# EAGLE board XuLA-6SLX (EAGLE 5.11)
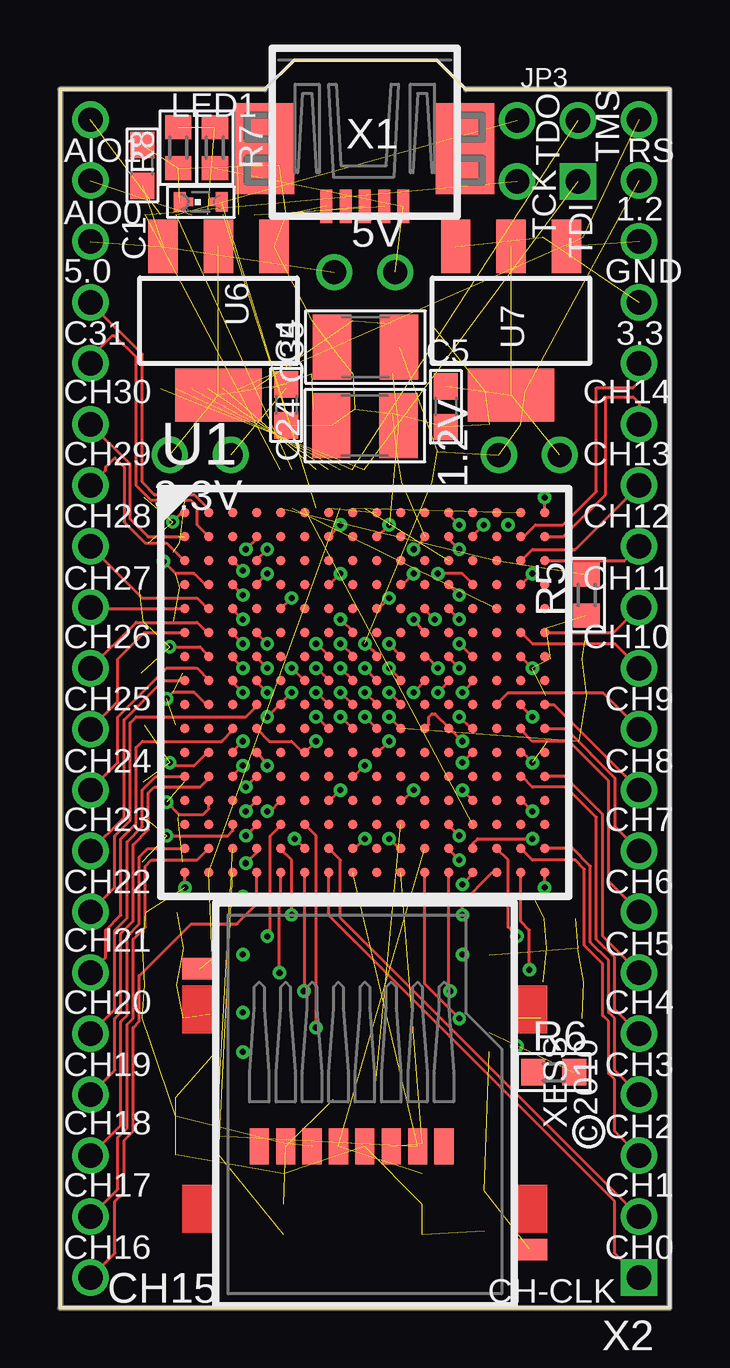
[diagram p0: board, top side]
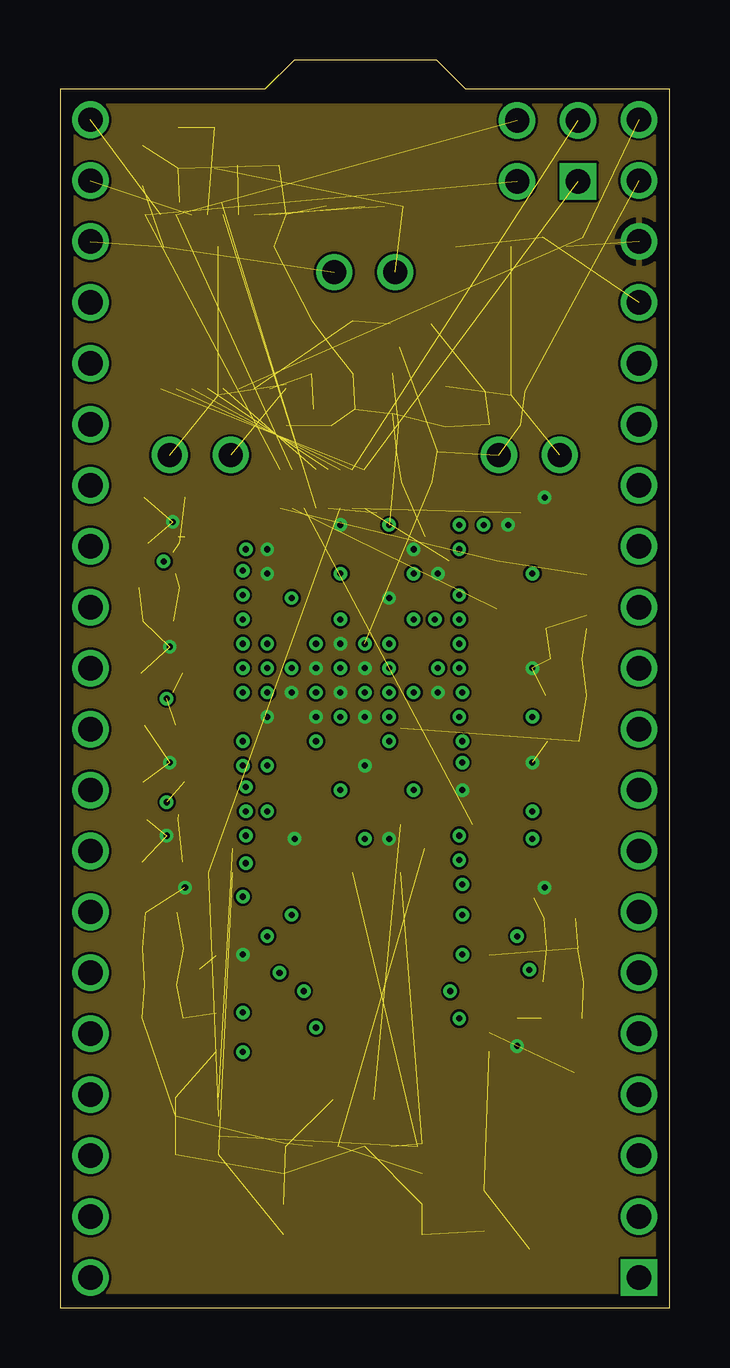
[diagram p1: board, inner layer Route2]
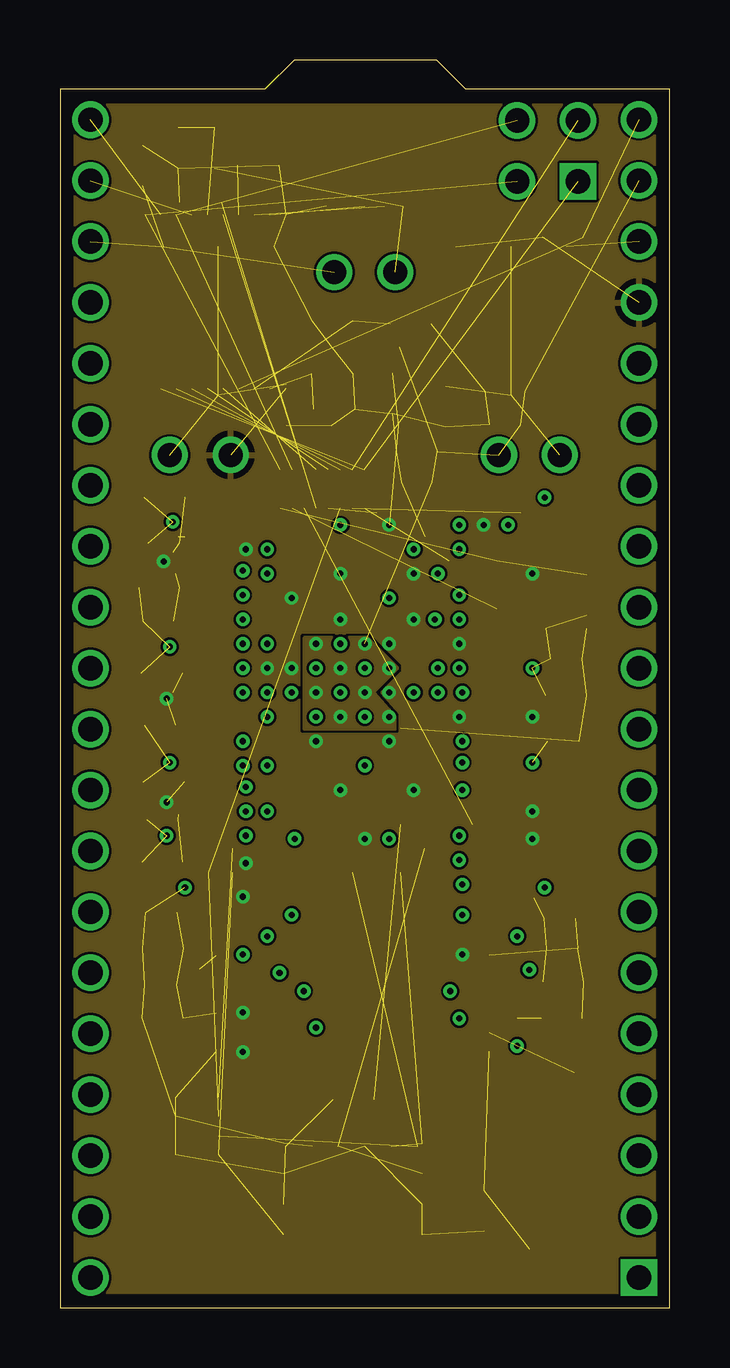
[diagram p2: board, inner layer Route3]
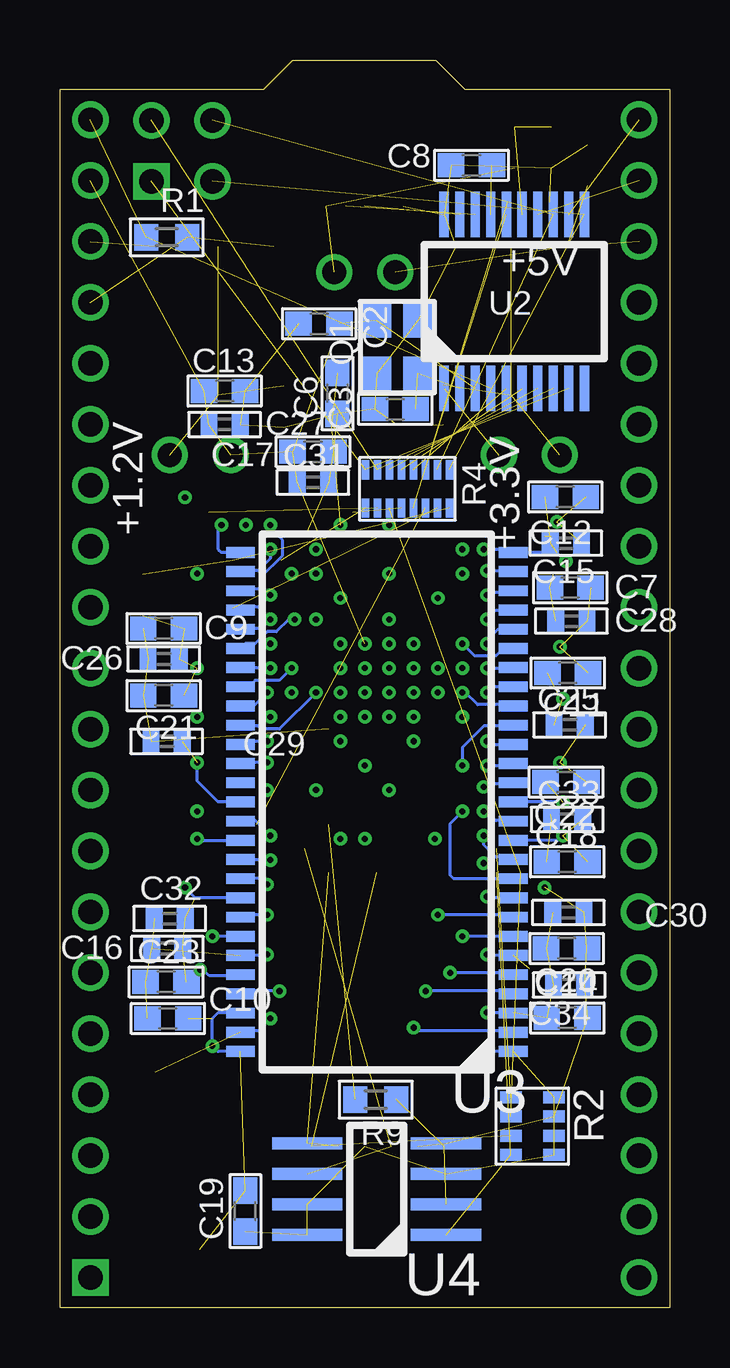
[diagram p3: board, bottom side, seen from below]

Size 25.4 x 52.02 mm. Coordinates in mm from the lower left corner, seen from the top.
Outline: 0,50.8 0,0 25.4,0 25.4,50.8 16.92,50.8 15.7,52.02 9.75,52.02 8.53,50.8 0,50.8
Copper layers (1*2*3*16): Top 0.035mm / dielectric 0.126mm / Route2 0.035mm / dielectric 1.626mm / Route3 0.035mm / dielectric 0.126mm / Bottom 0.035mm
Design rules "SEP_4layer": minimum track width 5mil, minimum drill 10mil, track to track 0.1mm, track to pad 0.1295mm, pad to pad 0.1mm, via to via 0.1mm, smd to smd 0.1mm, copper to edge 0.15mm, drill to drill 0.2mm, minimum pad ring 10mil, minimum via ring 6mil, stop-mask expansion 2mil, vias tented up to drill 0.6071mm, thermal gap 10mil
Net classes: 1 power: clearance 0.254 mm

## Footprints (pad centres in the part's own frame; a part is rotated, then mirrored left to right if it is on the bottom)
JP1-NOSILK = drill 1 round: 1 0,-1.27; 2 0,1.27
C0603 = smd 1.1 x 1: 1 -0.85,0; 2 0.85,0
C0402 = smd 0.7 x 0.9: 1 -0.65,0; 2 0.65,0
C1210 = smd 1.6 x 2.7: 1 -1.4,0; 2 1.4,0
2X02-NOSILK = drill 1.016 square: 1 -1.27,-1.27 | drill 1.016 round: 2 -1.27,1.27; 3 1.27,-1.27; 4 1.27,1.27
CHIPLED-0603-TTW = smd 0.8 x 0.5: A 0,-0.875; C 0,0.875 | smd 0.35 x 0.35: A@1 0,-0.5; C@1 0,0.5
32X25 = smd 1.2 x 1.4: 1 0,0; 2 0,-2.2; 3 1.7,-2.2; 4 1.7,0
R0603 = smd 1 x 1.1: 1 -0.85,0; 2 0.85,0
742C083 = smd 0.5 x 0.9: 1 -0.4,-0.9; 2 0.4,-0.9; 3 1.2,-0.9; 4 2,-0.9; 5 2,0.9; 6 1.2,0.9; 7 0.4,0.9; 8 -0.4,0.9
741X163 = smd 0.3 x 0.8: 1 -1.75,-0.8; 2 -1.25,-0.8; 3 -0.75,-0.8; 4 -0.25,-0.8; 5 0.25,-0.8; 6 0.75,-0.8; 7 1.25,-0.8; 8 1.75,-0.8; 9 1.75,0.8; 10 1.25,0.8; 11 0.75,0.8; 12 0.25,0.8; 13 -0.25,0.8; 14 -0.75,0.8; 15 -1.25,0.8; 16 -1.75,0.8
XILINX-FT256 = smd 0.4 x 0.4: A1 0,0; A2 1,0; A3 2,0; A4 3,0; A5 4,0; A6 5,0; A7 6,0; A8 7,0; A9 8,0; A10 9,0; A11 10,0; A12 11,0; A13 12,0; A14 13,0; A15 14,0; A16 15,0; B1 0,-1; B2 1,-1; B3 2,-1; B4 3,-1; B5 4,-1; B6 5,-1; B7 6,-1; B8 7,-1; B9 8,-1; B10 9,-1; B11 10,-1; B12 11,-1; B13 12,-1; B14 13,-1; B15 14,-1; B16 15,-1; C1 0,-2; C2 1,-2; C3 2,-2; C4 3,-2; C5 4,-2; C6 5,-2; C7 6,-2; C8 7,-2; C9 8,-2; C10 9,-2; C11 10,-2; C12 11,-2; C13 12,-2; C14 13,-2; C15 14,-2; C16 15,-2; D1 0,-3; D2 1,-3; D3 2,-3; D4 3,-3; D5 4,-3; D6 5,-3; D7 6,-3; D8 7,-3; D9 8,-3; D10 9,-3; D11 10,-3; D12 11,-3; D13 12,-3; D14 13,-3; D15 14,-3; D16 15,-3; E1 0,-4; E2 1,-4; E3 2,-4; E4 3,-4; E5 4,-4; E6 5,-4; E7 6,-4; E8 7,-4; E9 8,-4; E10 9,-4; E11 10,-4; E12 11,-4; E13 12,-4; E14 13,-4; E15 14,-4; E16 15,-4; F1 0,-5; F2 1,-5; F3 2,-5; F4 3,-5; F5 4,-5; F6 5,-5; F7 6,-5; F8 7,-5; F9 8,-5; F10 9,-5; F11 10,-5; F12 11,-5; F13 12,-5; F14 13,-5; F15 14,-5; F16 15,-5; G1 0,-6; G2 1,-6; G3 2,-6; G4 3,-6; G5 4,-6; G6 5,-6; G7 6,-6; G8 7,-6; G9 8,-6; G10 9,-6; G11 10,-6; G12 11,-6; G13 12,-6; G14 13,-6; G15 14,-6; G16 15,-6; H1 0,-7; H2 1,-7; H3 2,-7; H4 3,-7; H5 4,-7; H6 5,-7; H7 6,-7; H8 7,-7; H9 8,-7; H10 9,-7; H11 10,-7; H12 11,-7; H13 12,-7; H14 13,-7; H15 14,-7; H16 15,-7; J1 0,-8; J2 1,-8; J3 2,-8; J4 3,-8; J5 4,-8; J6 5,-8; J7 6,-8; J8 7,-8; J9 8,-8; J10 9,-8; J11 10,-8; J12 11,-8; J13 12,-8; J14 13,-8; J15 14,-8; J16 15,-8; K1 0,-9; K2 1,-9; K3 2,-9; K4 3,-9; K5 4,-9; K6 5,-9; K7 6,-9; K8 7,-9; K9 8,-9; K10 9,-9; K11 10,-9; K12 11,-9; K13 12,-9; K14 13,-9; K15 14,-9; K16 15,-9; L1 0,-10; L2 1,-10; L3 2,-10; L4 3,-10; L5 4,-10; L6 5,-10; L7 6,-10; L8 7,-10; L9 8,-10; L10 9,-10; L11 10,-10; L12 11,-10; L13 12,-10; L14 13,-10; L15 14,-10; L16 15,-10; M1 0,-11; M2 1,-11; M3 2,-11; M4 3,-11; M5 4,-11; M6 5,-11; M7 6,-11; M8 7,-11; M9 8,-11; M10 9,-11; M11 10,-11; M12 11,-11; M13 12,-11; M14 13,-11; M15 14,-11; M16 15,-11; N1 0,-12; N2 1,-12; N3 2,-12; N4 3,-12; N5 4,-12; N6 5,-12; N7 6,-12; N8 7,-12; N9 8,-12; N10 9,-12; N11 10,-12; N12 11,-12; N13 12,-12; N14 13,-12; N15 14,-12; N16 15,-12; P1 0,-13; P2 1,-13; P3 2,-13; P4 3,-13; P5 4,-13; P6 5,-13; P7 6,-13; P8 7,-13; P9 8,-13; P10 9,-13; P11 10,-13; P12 11,-13; P13 12,-13; P14 13,-13; P15 14,-13; P16 15,-13; R1 0,-14; R2 1,-14; R3 2,-14; R4 3,-14; R5 4,-14; R6 5,-14; R7 6,-14; R8 7,-14; R9 8,-14; R10 9,-14; R11 10,-14; R12 11,-14; R13 12,-14; R14 13,-14; R15 14,-14; R16 15,-14; T1 0,-15; T2 1,-15; T3 2,-15; T4 3,-15; T5 4,-15; T6 5,-15; T7 6,-15; T8 7,-15; T9 8,-15; T10 9,-15; T11 10,-15; T12 11,-15; T13 12,-15; T14 13,-15; T15 14,-15; T16 15,-15
MICROCHIP-20_SSOP = smd 1.89 x 0.38: 1 0,0; 2 0,-0.65; 3 0,-1.3; 4 0,-1.95; 5 0,-2.6; 6 0,-3.25; 7 0,-3.9; 8 0,-4.55; 9 0,-5.2; 10 0,-5.85; 11 7.25,-5.85; 12 7.25,-5.2; 13 7.25,-4.55; 14 7.25,-3.9; 15 7.25,-3.25; 16 7.25,-2.6; 17 7.25,-1.95; 18 7.25,-1.3; 19 7.25,-0.65; 20 7.25,0
TSOPII-54 = smd 1.2 x 0.45: 1 0,0; 2 0,-0.8; 3 0,-1.6; 4 0,-2.4; 5 0,-3.2; 6 0,-4; 7 0,-4.8; 8 0,-5.6; 9 0,-6.4; 10 0,-7.2; 11 0,-8; 12 0,-8.8; 13 0,-9.6; 14 0,-10.4; 15 0,-11.2; 16 0,-12; 17 0,-12.8; 18 0,-13.6; 19 0,-14.4; 20 0,-15.2; 21 0,-16; 22 0,-16.8; 23 0,-17.6; 24 0,-18.4; 25 0,-19.2; 26 0,-20; 27 0,-20.8; 28 11.36,-20.8; 29 11.36,-20; 30 11.36,-19.2; 31 11.36,-18.4; 32 11.36,-17.6; 33 11.36,-16.8; 34 11.36,-16; 35 11.36,-15.2; 36 11.36,-14.4; 37 11.36,-13.6; 38 11.36,-12.8; 39 11.36,-12; 40 11.36,-11.2; 41 11.36,-10.4; 42 11.36,-9.6; 43 11.36,-8.8; 44 11.36,-8; 45 11.36,-7.2; 46 11.36,-6.4; 47 11.36,-5.6; 48 11.36,-4.8; 49 11.36,-4; 50 11.36,-3.2; 51 11.36,-2.4; 52 11.36,-1.6; 53 11.36,-0.8; 54 11.36,0
SPI-8_SOIC_150_208 = smd 2.921 x 0.51: 1 1.06,0; 2 1.06,-1.27; 3 1.06,-2.54; 4 1.06,-3.81; 5 6.839,-3.81; 6 6.839,-2.54; 7 6.839,-1.27; 8 6.839,0
SOT223 = smd 1.219 x 2.235: 1 -2.311,-3.099; 2 0,-3.099; 3 2.311,-3.099 | smd 3.6 x 2.2: 4 0,3.099
UX60SC-MB-5ST = smd 1.4 x 0.5: 1 6.1,1.6; 2 6.1,0.8; 3 6.1,0; 4 6.1,-0.8; 5 6.1,-1.6 | smd 3.8 x 2.449: M1 3.7,-4.175; M2 3.7,4.175
XULA-DIP40 = drill 1.016 square: 1 49.53,24.13 | drill 1.016 round: 2 46.99,24.13; 3 44.45,24.13; 4 41.91,24.13; 5 39.37,24.13; 6 36.83,24.13; 7 34.29,24.13; 8 31.75,24.13; 9 29.21,24.13; 10 26.67,24.13; 11 24.13,24.13; 12 21.59,24.13; 13 19.05,24.13; 14 16.51,24.13; 15 13.97,24.13; 16 11.43,24.13; 17 8.89,24.13; 18 6.35,24.13; 19 3.81,24.13; 20 1.27,24.13; 21 49.53,1.27; 22 46.99,1.27; 23 44.45,1.27; 24 41.91,1.27; 25 39.37,1.27; 26 36.83,1.27; 27 34.29,1.27; 28 31.75,1.27; 29 29.21,1.27; 30 26.67,1.27; 31 24.13,1.27; 32 21.59,1.27; 33 19.05,1.27; 34 16.51,1.27; 35 13.97,1.27; 36 11.43,1.27; 37 8.89,1.27; 38 6.35,1.27; 39 3.81,1.27; 40 1.27,1.27
SCHD3A0100 = smd 0.8 x 1.5: 1 3.3,-10.15; 2 2.2,-10.15; 3 1.1,-10.15; 4 0,-10.15; 5 -1.1,-10.15; 6 -2.2,-10.15; 7 -3.3,-10.15; 8 -4.4,-10.15 | smd 1.45 x 0.9: G1 6.875,-14.45; G2 -6.875,-2.75

## Placement (x,y rotation side)
1.2V  [JP1-NOSILK]  19.56,35.56 90 top
3.3V  [JP1-NOSILK]  5.84,35.56 270 top
5V  [JP1-NOSILK]  12.7,43.18 90 top
C1  4.7uF  [C0603]  3.43,47.62 90 top
C2  10pF  [C0603]  14.61,41.02 180 bottom
C3  10pF  [C0603]  11.43,37.47 180 bottom
C4  4.7uF  [C0603]  9.42,37.64 270 top
C5  4.7uF  [C0603]  16.08,37.57 270 top
C6  0.1uF  [C0603]  13.84,38.13 270 bottom
C7  0.1uF  [C0603]  4.14,30.02 0 bottom
C8  0.47uF  [C0603]  8.26,47.62 180 bottom
C9  0.1uF  [C0603]  21.08,28.32 0 bottom
C10  0.1uF  [C0603]  20.9,12.06 0 bottom
C11  0.1uF  [C0603]  4.24,26.47 0 bottom
C12  0.1uF  [C0603]  4.34,33.81 0 bottom
C13  0.1uF  [C0603]  18.54,38.23 0 bottom
C14  0.1uF  [C0603]  4.27,12.09 0 bottom
C15  10nF  [C0402]  4.32,31.88 0 bottom
C16  10nF  [C0402]  20.93,14.99 0 bottom
C17  0.1uF  [C0603]  14.86,35.69 0 bottom
C18  0.1uF  [C0603]  4.27,18.59 0 bottom
C19  0.1uF  [C0603]  17.68,4.04 90 bottom
C20  0.1uF  [C0603]  4.29,14.99 0 bottom
C21  0.1uF  [C0603]  21.08,25.53 0 bottom
C22  0.1uF  [C0603]  4.32,21.92 0 bottom
C23  0.1uF  [C0603]  20.98,13.59 0 bottom
C24  22uF  [C1210]  12.7,36.78 180 top
C25  10nF  [C0402]  4.17,24.31 0 bottom
C26  10nF  [C0402]  21.08,27.05 0 bottom
C27  10nF  [C0402]  18.54,36.83 0 bottom
C28  10nF  [C0402]  4.09,28.63 0 bottom
C29  10nF  [C0402]  20.95,23.62 0 bottom
C30  10nF  [C0402]  4.22,16.48 0 bottom
C31  10nF  [C0402]  14.86,34.42 0 bottom
C32  10nF  [C0402]  20.83,16.23 0 bottom
C33  10nF  [C0402]  4.27,20.37 0 bottom
C34  10nF  [C0402]  4.19,13.46 0 bottom
C35  22uF  [C1210]  12.73,40.05 180 top
JP3  [2X02-NOSILK]  20.32,48.23 90 top
LED1  LED0603  [CHIPLED-0603-TTW]  5.87,46.1 90 top
Q1  12 MHz  [32X25]  12.19,41.15 0 bottom
R1  5.1K  [R0603]  20.95,44.63 0 bottom
R2  [742C083]  5.71,8.38 270 bottom
R4  100  [741X163]  10.92,34.14 180 bottom
R5  5.1K  [R0603]  21.95,29.72 90 top
R6  5.1K  [R0603]  20.57,9.83 0 top
R7  330K  [R0603]  6.45,48.36 270 top
R8  680K  [R0603]  4.93,48.36 270 top
R9  100  [R0603]  12.24,8.69 180 bottom
U1  XC6SLX25-FT256  [XILINX-FT256]  5.2,33.15 0 top
U2  PIC 18F14K50 uC  [MICROCHIP-20_SSOP]  9.4,38.33 90 bottom
U3  SDRAM-16MX16-WINBOND  [TSOPII-54]  6.52,10.69 180 bottom
U4  SPI_FLASH-SOIC_150_208  [SPI-8_SOIC_150_208]  8.26,3.05 180 bottom
U6  +3.3V Reg.  [SOT223]  6.6,41.15 180 top
U7  +1.2V Reg.  [SOT223]  18.8,41.15 180 top
U$2  CC_CC  [CC_CC]  -1.91,-15.88 0 top  (outside the outline)
U$3  CC_BY  [CC_BY]  5.08,-14.61 0 top  (outside the outline)
U$4  CC_SA  [CC_SA]  10.16,-14.61 0 top  (outside the outline)
U$5  CC_COPYRIGHT  [CC_COPYRIGHT]  -1.91,-6.99 0 top  (outside the outline)
X1  MINI-USB-UX60SC-MB-5STUX60SC-MB-5ST  [UX60SC-MB-5ST]  12.7,52.02 270 top
X2  XULA-CONN  [XULA-DIP40]  0,50.8 270 top
X3  MICROSD_CON  [SCHD3A0100]  12.7,16.89 0 top

## Library data of the parts
1.2V 3.3V 5V U1 U$2-U$5 X2 = xess
C1 C4 C5 = rcl; DIGIKEY#: 490-3302-1-ND; MANF: Murata; MANF#: GRM188F51A475ZE20J; MOUSER#: 81-GRM188F51A475ZE20
C2 C3 = rcl; DIGIKEY#: 490-1403-1-ND; MANF: Murata; MANF#: GRM1885C1H100JA01D; MOUSER#: 81-GRM39C100D50
C6 C7 C9-C14 C17-C23 = rcl; DIGIKEY#: 445-1317-1-ND; MANF: TDK; MANF#: C1608X7R1C104K; MOUSER#: 810-C1608X7R1C104K
C8 = rcl; DIGIKEY#: 445-5192-1-ND; MANF: TDK; MANF#: C1608X7R1C474K; MOUSER#: 810-C1608X7R1C474K
C15 C16 C25-C34 = rcl; DIGIKEY#: 445-3447-1-ND; MANF: TDK; MANF#: C1005Y5V1H103Z; MOUSER#: 810-C1005Y5V1H103Z
C24 C35 = rcl; DIGIKEY#: 490-1895-1-ND; MANF: Murata; MANF#: GRM32CF51A226ZA01L; MOUSER#: 81-GRM32CF51A226ZA01
JP3 = pinhead
LED1 = xess; DIGIKEY#: 160-1834-1-ND; MANF: Lite-On; MANF#: LTST-C194KGKT; MOUSER#: 859-LTST-C194KGKT
Q1 = xess; DIGIKEY#: 535-10901-1-ND; MANF: Abracon; MANF#: ABM8G-12.000MHZ-4Y-T3; MOUSER#: 815-ABM8G-12-B4Y-T
R1 R5 R6 = rcl; MANF: Xicon; MANF#: 301-5.1K-RC; MOUSER#: 301-5.1K-RC
R2 = xess; DIGIKEY#: 742C083???JPCT-ND; MANF: CTS Resistor Products; MANF#: 742C083???JPTR; MOUSER#: 774-742C083???JP
R4 = xess; DIGIKEY#: 741X163101JPCT-ND; MANF: CTS; MANF#: 741X163101JP; MOUSER#: 774-741X163101JP
R7 = rcl; MANF: Xicon; MANF#: 301-330K-RC; MOUSER#: 301-330K-RC
R8 = rcl; MANF: Xicon; MANF#: 301-680K-RC; MOUSER#: 301-680K-RC
R9 = rcl; MANF: Xicon; MANF#: 301-110-RC; MOUSER#: 301-110-RC
U2 = xess; DIGIKEY#: PIC18F14K50-I/SS-ND; MANF: Microchip; MANF#: PIC18F14K50-I/SS; MOUSER#: 579-PIC18F14K50-I/SS
U3 = xess; MANF: Winbond; MANF#: W9825G6JH-5
U4 = xess; MANF: Winbond
U6 = xess; DIGIKEY#: ZLDO1117G33DICT-ND; MANF: Diodes/Zetex; MANF#: ZLDO1117G33TA; MOUSER#: 522-ZLDO1117G33TA
U7 = xess; DIGIKEY#: ZLDO1117G12DICT-ND; MANF: Diodes/Zetex; MANF#: ZLDO1117G12TA; MOUSER#: 522-ZLDO1117G12TA
X1 = xess; DIGIKEY#: H11589CT-ND; MANF: Hirose; MANF#: UX60SC-MB-5ST; MOUSER#: 798-UX60SC-MB-5ST
X3 = xess; MANF: ALPS; MANF#: SCHD3A0100; MOUSER#: 688-SCHD3A0100

## Nets
+1.2V: 1.2V.2 C9.1 C13.1 C17.1 C21.1 C26.1 C27.1 C29.1 C31.1 C35.1 U1.G7 U1.G9 U1.H8 U1.H10 U1.J7 U1.J9 U1.K8 U1.K10 X2.19
+3.3V: 3.3V.2 C6.1 C7.1 C10.1 C11.1 C12.1 C14.1 C15.1 C16.1 C18.1 C19.1 C20.1 C22.1 C23.1 C24.1 C25.1 C28.1 C30.1 C32.1 C33.1 C34.1 R1.2 R2.5 R2.6 R2.8 U1.B4 U1.B9 U1.B13 U1.D2 U1.D7 U1.D10 U1.D15 U1.E5 U1.F8 U1.F11 U1.G4 U1.G10 U1.G13 U1.H6 U1.J2 U1.J10 U1.J15 U1.K4 U1.K13 U1.L6 U1.L9 U1.N2 U1.N7 U1.N10 U1.N15 U1.R4 U1.R8 U1.R13 U2.1 U3.1 U3.3 U3.9 U3.14 U3.27 U3.43 U3.49 U4.3 U4.7 U4.8 U7.3 X2.17 X3.4
+5V: 5V.2 C1.1 U6.3 X2.38
+5V-USB: 5V.1 R7.2 X1.1
A0: U1.F3 U3.23
A1: U1.E3 U3.24
A2: U1.D3 U3.25
A3: U1.C3 U3.26
A4: U1.B12 U3.29
A5: U1.A12 U3.30
A6: U1.D12 U3.31
A7: U1.E12 U3.32
A8: U1.E11 U3.33
A9: U1.G12 U3.34
A10: U1.F4 U3.22
A11: U1.G11 U3.35
A12: U1.H13 U3.36
ANALOG-IO0: U2.14 X2.39
ANALOG-IO1: U2.12 X2.40
BS0: U1.H3 U3.20
BS1: U1.G3 U3.21
CAS#: U1.L3 U3.17
CHAN0: U1.R7 X2.2
CHAN1: U1.R15 X2.3
CHAN2: U1.R16 X2.4
CHAN3: U1.M15 X2.5
CHAN4: U1.M16 X2.6
CHAN5: U1.K15 X2.7
CHAN6: U1.K16 X2.8
CHAN7: U1.J16 X2.9
CHAN8: U1.J14 X2.10
CHAN9: U1.F15 X2.11
CHAN10: U1.F16 X2.12
CHAN11: U1.C16 X2.13
CHAN12: U1.C15 X2.14
CHAN13: U1.B16 X2.15
CHAN14: U1.B15 X2.16
CHAN15: U1.T4 X2.21
CHAN16: U1.R2 X2.22
CHAN17: U1.R1 X2.23
CHAN18: U1.M2 X2.24
CHAN19: U1.M1 X2.25
CHAN20: U1.K3 X2.26
CHAN21: U1.J4 X2.27
CHAN22: U1.H1 X2.28
CHAN23: U1.H2 X2.29
CHAN24: U1.F1 X2.30
CHAN25: U1.F2 X2.31
CHAN26: U1.E1 X2.32
CHAN27: U1.E2 X2.33
CHAN28: U1.C1 X2.34
CHAN29: U1.B1 X2.35
CHAN30: U1.B2 X2.36
CHAN31: U1.A2 X2.37
CHAN-CLK: U1.T7 X2.1
CKE: U1.H11 U3.37
D0: U1.P6 U3.2
D1: U1.T6 U3.4
D2: U1.T5 U3.5
D3: U1.P5 U3.7
D4: U1.R5 U3.8
D5: U1.N5 U3.10
D6: U1.P4 U3.11
D7: U1.N4 U3.13
D8: U1.P12 U3.42
D9: U1.R12 U3.44
D10: U1.T13 U3.45
D11: U1.T14 U3.47
D12: U1.R14 U3.48
D13: U1.T15 U3.50
D14: U1.T12 U3.51
D15: R6.2 U1.T11 U3.53
DONE: R4.3 U2.16
FLASH-CS#: R2.4 U1.T3 U4.1
FPGA-CCLK: U1.R11 U4.6 X3.5
FPGA-CLK: R4.12 U1.A9
FPGA-DONE: R4.14 U1.P13
FPGA-INIT#: R2.1 U1.R3
FPGA-M0: R6.1
FPGA-M1: U1.N11
FPGA-MISO: R9.2 U1.P10
FPGA-MOSI: U1.T10 U4.5 X3.3
FPGA-PROG_B: R2.2 R4.11 U1.T2
FPGA-TCK: R4.16 R5.2 U1.C14
FPGA-TDI: R4.9 U1.C12
FPGA-TDO: R4.15 U1.E14
FPGA-TMS: R4.10 U1.A15
GND: C1.2 C2.2 C3.2 C4.2 C5.2 C6.2 C7.2 C8.2 C9.2 C10.2 C11.2 C12.2 C13.2 C14.2 C15.2 C16.2 C17.2 C18.2 C19.2 C20.2 C21.2 C22.2 C23.2 C24.2 C25.2 C26.2 C27.2 C28.2 C29.2 C30.2 C31.2 C32.2 C33.2 C34.2 C35.2 LED1.C Q1.2 Q1.4 R2.7 R5.1 R8.2 U1.A1 U1.A16 U1.B7 U1.B11 U1.C4 U1.D4 U1.D13 U1.E9 U1.G2 U1.G8 U1.G15 U1.H7 U1.H9 U1.H12 U1.J5 U1.J8 U1.K7 U1.K9 U1.L2 U1.L15 U1.M8 U1.N13 U1.P3 U1.R6 U1.R10 U1.T1 U1.T16 U2.20 U3.6 U3.12 U3.28 U3.41 U3.46 U3.52 U3.54 U4.4 U6.1 U7.1 X1.5 X2.18 X3.6 X3.G1 X3.G2
LDQM: U1.M4 U3.15
LED: R4.4 U2.5
N$1: 3.3V.1 C4.1 U6.2 U6.4
N$2: 1.2V.1 C5.1 U7.2 U7.4
N$7: R4.5 U2.6
N$8: R9.1 U4.2 X3.7
N$11: LED1.A R4.13
OSC1: C3.1 Q1.3 U2.2
OSC2: C2.1 Q1.1 U2.3
PROG#: R4.6 U2.7
RAS#: U1.L4 U3.18
RST#: R1.1 U2.4 X2.20
SD-CS#: R2.3 U1.T8 X3.2
SDRAM-CLK: U1.K11 U1.K12 U3.38
SDRAM-CS#: U1.H4 U3.19
SENSE-USB: R7.1 R8.1 U2.15
TCK: JP3.2 R4.1 U2.11
TDI: JP3.1 R4.8 U2.9
TDO: JP3.4 R4.2 U2.13
TMS: JP3.3 R4.7 U2.8
UDQM: U1.L13 U3.39
USB_D+: U2.19 X1.3
USB_D-: U2.18 X1.2
VUSB: C8.1 U2.17
WE#: U1.M3 U3.16

## Tracks (layer width: path | path; a pad name or v marks a point on that pad's centre or on a via)
+1.2V  (via drill 0.25)  (11 unrouted)
  Top 0.127: U1.G7 11.2,27.2 v10.67,27.69 | U1.H8 12.2,26.17 v11.68,26.67 | U1.G9 13.2,27.17 13.33,27.17 v12.7,27.69 | U1.H10 14.24,26.15 v13.72,26.67 | U1.K10 v13.72,24.64 | U1.J9 v12.7,25.65 | U1.J7 11.2,25.17 v10.67,25.65 | U1.K8 v11.68,24.64
  pour Route3: 10.16,27.94 10.16,24.13 13.97,24.13 13.97,24.64 13.08,25.65 14.1,26.67 12.83,27.94
+3.3V  (via drill 0.25)  (30 unrouted)
  Top 0.127: U1.B4 8.2,32.08 v7.75,31.62 | U1.E5 v9.65,29.59 | U1.D7 11.22,30.15 v11.68,30.61 | U1.F8 12.27,28.15 v11.68,28.7 | U1.B9 13.22,32.15 v13.72,32.64 | U1.D10 14.27,30.15 v14.73,30.61 | v13.72,27.69 U1.G10 14.2,27.07 | U1.F11 15.2,28.11 v14.73,28.7 | U1.J10 14.22,25.15 v13.72,25.65 | U1.L9 13.24,23.15 v13.72,23.62 | U1.L6 | U1.L6 v10.67,23.62 | U1.N7 11.24,21.15 v11.68,21.59 | U1.R8 12.29,19.15 v12.7,19.56 | U1.N10 14.29,21.15 v14.73,21.59 | U1.D15 19.23,30.15 v19.68,30.61 | U1.B13 17.2,32.19 v17.65,32.64 | U1.G4 8.2,27.11 v8.64,26.67 | U1.H6 10.18,26.15 v9.65,26.67 | U1.G13 17.18,27.15 v16.64,27.69 | U1.N15 19.24,21.15 v19.68,20.7 | U1.R13 17.2,19.36 17.4,19.56 v19.68,19.56 | U1.J15 19.2,25.12 v19.68,24.64 | U1.K13 17.13,24.15 v16.64,24.64 | U1.D2 6.05,30.15 5.59,30.61 4.83,30.61 v4.32,31.11 | U1.N2 6.2,20.8 5.97,20.57 4.95,20.57 v4.45,21.08 | U1.R4 8.2,19 v7.75,18.54 | U1.L6 10.12,23.15 9.65,23.62 8.72,23.62 U1.K4 | U1.J2 6.09,25.15 5.59,25.65 4.7,25.65 v4.45,25.4
  Bottom 0.127: v7.75,31.62 6.65,31.62 U3.27 4.7,31.49 v4.32,31.11 | U3.43 19.62,19.49 v19.68,19.56 | U3.49 16.8,14.69 v16.76,14.73 | U3.14 4.46,21.09 v4.45,21.08 | U3.9 7.57,17.09 v7.62,17.14 | U3.3 7.59,12.29 v7.62,12.32 | U3.1 7.59,10.69 v7.62,10.67
  pour Route3 (rank 2): 0.64,50.16 24.77,50.16 24.77,0.64 0.64,0.64
+5V  (3 unrouted)
+5V-USB  (2 unrouted)
A0  (via drill 0.25)
  Top 0.127: U1.F3 7.2,28.11 v7.62,27.69
  Bottom 0.127: v7.62,27.69 7.62,27.81 7.11,28.32 6.55,28.32 U3.23
A1  (via drill 0.25)
  Top 0.127: U1.E3 7.2,29.12 v7.62,28.7
  Bottom 0.127: v7.62,28.7 7.24,29.08 U3.24
A2  (via drill 0.25)
  Top 0.127: U1.D3 7.2,30.14 v7.62,29.72
  Bottom 0.127: v7.62,29.72 7.49,29.84 6.57,29.84 U3.25
A3  (via drill 0.25)
  Top 0.127: U1.C3 v7.62,30.73
  Bottom 0.127: v7.62,30.73 6.56,30.73 U3.26
A4  (via drill 0.25)
  Top 0.127: U1.B12 16.2,32.06 v16.64,31.62
  Bottom 0.127: v16.64,31.62 16.64,31.24 17.14,30.73 17.84,30.73 U3.29
A5  (via drill 0.25)
  Top 0.127: U1.A12 16.2,33.08 v16.64,32.64
  Bottom 0.127: v16.64,32.64 16.64,32.51 16.13,32 16.13,31.37 17.02,30.48 17.02,30.1 17.14,29.97 17.8,29.97 U3.30
A6  (via drill 0.25)
  Top 0.127: U1.D12 v16.64,29.72
  Bottom 0.127: v16.64,29.72 17.14,29.21 17.76,29.21 U3.31
A7  (via drill 0.25)
  Top 0.127: U1.E12 16.2,29.14 v16.64,28.7
  Bottom 0.127: v16.64,28.7 17.02,28.32 17.85,28.32 U3.32
A8  (via drill 0.25)
  Top 0.127: U1.E11 15.2,29.12 v15.62,28.7
  Bottom 0.127: v15.62,28.7 15.88,28.7 16.38,28.19 16.76,28.19 17.27,27.69 17.69,27.69 U3.33 17.82,27.56
A9  (via drill 0.25)
  Top 0.127: U1.G12 16.2,27.11 v16.64,26.67
  Bottom 0.127: v16.64,26.67 17.86,26.67 U3.34
A10  (via drill 0.25)
  Top 0.127: U1.F4 8.2,28.12 v8.64,27.69
  Bottom 0.127: v8.64,27.69 8.13,27.18 7.24,27.18 7.11,27.3 6.71,27.3 U3.22
A11  (via drill 0.25)
  Top 0.127: U1.G11 15.27,27.15 v15.75,26.67
  Bottom 0.127: U3.35 17.87,25.91 17.53,25.91 17.27,26.16 16.26,26.16 v15.75,26.67
A12  (via drill 0.25)
  Top 0.127: U1.H13 17.2,26.09 v16.76,25.65
  Bottom 0.127: v16.76,25.65 17.27,25.15 17.83,25.15 U3.36
ANALOG-IO0  (1 unrouted)
ANALOG-IO1  (1 unrouted)
BS0  (via drill 0.25)
  Top 0.127: U1.H3 7.2,26.07 v7.62,25.65
  Bottom 0.127: v7.62,25.65 7.37,25.91 6.54,25.91 U3.20
BS1  (via drill 0.25)
  Top 0.127: U1.G3 7.2,27.09 v7.62,26.67
  Bottom 0.127: v7.62,26.67 6.54,26.67 U3.21
CAS#  (via drill 0.25)
  Top 0.127: U1.L3 7.2,23.2 v7.62,23.62
  Bottom 0.127: v7.62,23.62 7.49,23.5 U3.17
CHAN0
  Top 0.127: U1.R7 11.68,18.67 11.68,16.26 X2.2
CHAN1
  Top 0.127: U1.R15 19.68,18.67 21.46,18.67 21.84,18.29 21.84,15.11 22.61,14.35 22.61,12.19 22.86,11.94 22.86,9.78 23.11,9.53 23.11,7.37 X2.3
CHAN2
  Top 0.127: U1.R16 21.37,19.15 22.1,18.41 22.1,15.24 22.86,14.48 22.86,12.32 23.11,12.06 23.11,9.91 X2.4
CHAN3
  Top 0.127: U1.M15 19.25,22.15 19.68,21.72 21.08,21.72 22.35,20.45 22.35,15.37 23.11,14.61 23.11,12.45 X2.5
CHAN4
  Top 0.127: U1.M16 21.03,22.15 22.61,20.57 22.61,15.49 X2.6
CHAN5
  Top 0.127: U1.K15 19.2,24.11 19.68,23.62 21.21,23.62 22.86,21.97 22.86,17.78 X2.7
CHAN6
  Top 0.127: U1.K16 21.07,24.15 23.11,22.1 23.11,20.07 X2.8
CHAN7
  Top 0.127: U1.J16 20.57,25.15 X2.9
CHAN8
  Top 0.127: U1.J14 18.2,25.18 18.67,25.65 22.61,25.65 X2.10
CHAN9
  Top 0.127: U1.F15 19.22,28.15 19.68,27.69 23.11,27.69 X2.11
CHAN10
  Top 0.127: U1.F16 23.07,28.15 X2.12
CHAN11
  Top 0.127: U1.C16 23.53,31.15 X2.13
CHAN12
  Top 0.127: U1.C15 19.68,31.62 21.46,31.62 X2.14
CHAN13
  Top 0.127: U1.B16 20.97,32.15 22.73,33.91 22.73,37.97 23.88,37.97 24.13,37.72 X2.15
CHAN14
  Top 0.127: U1.B15 19.33,32.15 19.81,32.64 20.95,32.64 22.35,34.04 22.35,38.35 23.88,38.35 24.13,38.61 X2.16
CHAN15
  Top 0.127: U1.T4 8.2,16.84 7.37,16 5.46,16 3.3,13.84 3.3,11.94 3.05,11.68 3.05,7.37 2.67,6.99 2.67,4.83 2.29,4.45 2.29,2.29 X2.21
CHAN16
  Top 0.127: U1.R2 5.71,18.67 3.81,18.67 3.56,18.41 3.56,15.88 3.05,15.37 3.05,12.06 2.79,11.81 2.79,7.49 2.41,7.11 2.41,4.95 X2.22
CHAN17
  Top 0.127: U1.R1 3.65,19.15 3.3,18.8 3.3,16 2.79,15.49 2.79,12.19 2.54,11.94 2.54,7.62 X2.23
CHAN18
  Top 0.127: U1.M2 6.2,22.07 5.84,21.72 3.94,21.72 3.68,21.46 3.68,19.94 3.05,19.3 3.05,16.13 2.54,15.62 2.54,12.32 2.29,12.06 2.29,9.91 X2.24
CHAN19
  Top 0.127: U1.M1 3.99,22.15 3.43,21.59 3.43,20.07 2.79,19.43 2.79,16.26 2.29,15.75 2.29,12.45 X2.25
CHAN20
  Top 0.127: U1.K3 7.2,24.09 6.73,23.62 3.43,23.62 3.17,23.37 3.17,20.19 2.54,19.56 2.54,16.38 1.91,15.75 1.91,14.61 X2.26
CHAN21
  Top 0.127: U1.J4 8.2,25.09 7.75,24.64 3.17,24.64 2.92,24.38 2.92,20.32 2.29,19.68 2.29,17.53 X2.27
CHAN22
  Top 0.127: U1.H1 4.3,26.15 2.67,24.51 2.67,20.45 X2.28
CHAN23
  Top 0.127: U1.H2 6.2,26.18 5.71,26.67 4.45,26.67 2.41,24.64 2.41,22.73 X2.29
CHAN24
  Top 0.127: U1.F1 3.51,28.15 2.41,27.05 2.41,25.27 X2.30
CHAN25
  Top 0.127: U1.F2 6.14,28.15 5.71,28.57 3.17,28.57 X2.31
CHAN26
  Top 0.127: U1.E1 1.33,29.15 X2.32
CHAN27
  Top 0.127: U1.E2 6.16,29.15 5.71,29.59 3.43,29.59 X2.33
CHAN28
  Top 0.127: U1.C1 5.17,31.15 4.45,31.88 3.56,31.88 2.67,32.77 2.67,35.05 2.29,35.43 1.91,35.05 1.91,34.92 X2.34
CHAN29  (1 unrouted)
  Top 0.127: 4.94,32.15 3.67,32.15 2.92,32.89 2.92,35.18 X2.35
CHAN30
  Top 0.127: U1.B2 5.71,32.64 5.71,33.4 5.46,33.66 3.81,33.66 3.17,34.29 3.17,39.62 2.29,40.51 2.16,40.51 1.52,39.88 1.52,39.62 X2.36
CHAN31
  Top 0.127: U1.A2 6.2,33.3 5.59,33.91 3.94,33.91 3.43,34.42 3.43,39.75 X2.37
CHAN-CLK
  Top 0.127: U1.T7 11.2,16.36 23.11,4.45 23.11,2.29 X2.1
CKE  (via drill 0.25)
  Top 0.127: U1.H11 15.22,26.15 | 15.22,26.15 15.26,26.15 | 15.22,26.15 v14.73,25.65
  Bottom 0.127: v14.73,25.65 16.26,24.13 17.02,24.13 17.14,24.26 17.84,24.26 U3.37
D0  (via drill 0.25)
  Top 0.127: U1.P6 10.67,19.68 v10.67,11.68
  Bottom 0.127: v10.67,11.68 10.54,11.56 6.58,11.56 U3.2
D1  (via drill 0.25)
  Top 0.127: U1.T6 10.2,13.25 v10.16,13.21
  Bottom 0.127: v10.16,13.21 6.63,13.21 U3.4
D2  (via drill 0.25)
  Top 0.127: U1.T5 9.2,16.84 9.14,16.76 v9.14,13.97
  Bottom 0.127: v9.14,13.97 6.6,13.97 U3.5
D3  (via drill 0.25)
  Top 0.127: U1.P5 9.2,20.12 8.76,19.68 8.76,15.49 v8.64,15.49
  Bottom 0.127: v8.64,15.49 U3.7
D4  (via drill 0.25)
  Top 0.127: U1.R5 9.2,19.11 9.65,18.67 v9.65,16.38
  Bottom 0.127: v9.65,16.38 6.61,16.38 U3.8
D5  (via drill 0.25)
  Top 0.127: v8.64,20.7 8.75,20.7 U1.N5
  Bottom 0.127: U3.10 9,17.89 9.14,18.03 9.14,20.19 v8.64,20.7
D6  (via drill 0.25)
  Top 0.127: U1.P4 8.2,20.14 v7.75,19.68
  Bottom 0.127: v7.75,19.68 7.75,19.3 7.24,18.8 6.62,18.8 U3.11
D7  (via drill 0.25)
  Top 0.127: U1.N4 v7.75,20.7
  Bottom 0.127: v7.75,20.7 7.62,20.7 7.24,20.32 6.55,20.32 U3.13
D8  (via drill 0.25)
  Top 0.127: U1.P12 16.2,20.12 v16.64,19.68
  Bottom 0.127: v16.64,19.68 17.27,20.32 17.85,20.32 U3.42
D9  (via drill 0.25)
  Top 0.127: U1.R12 16.2,19.11 v16.64,18.67
  Bottom 0.127: v16.64,18.67 17.86,18.67 U3.44
D10  (via drill 0.25)
  Top 0.127: U1.T13 17.2,18.09 v16.76,17.65
  Bottom 0.127: v16.76,17.65 17.02,17.91 17.87,17.91 U3.45
D11  (via drill 0.25)
  Top 0.127: U1.T14 18.02,18.15 16.76,16.89 v16.76,16.38
  Bottom 0.127: v16.76,16.38 17.79,16.38 U3.47
D12  (via drill 0.25)
  Top 0.127: U1.R14 18.2,19.14 18.67,18.67 18.67,15.88 v19.05,15.49
  Bottom 0.127: v19.05,15.49 U3.48
D13  (via drill 0.25)
  Top 0.127: U1.T15 19.2,16.11 19.56,15.75 v19.56,14.1
  Bottom 0.127: v19.56,14.1 19.43,14.1 19.18,13.84 17.93,13.84 U3.50
D14  (via drill 0.25)
  Top 0.127: U1.T12 16.2,13.26 v16.26,13.21
  Bottom 0.127: v16.26,13.21 17.77,13.21 U3.51
D15  (via drill 0.25)  (1 unrouted)
  Top 0.127: U1.T11 15.2,13.5 v16.64,12.06
  Bottom 0.127: v16.64,12.06 17.14,11.56 17.82,11.56 U3.53
DONE  (1 unrouted)
FLASH-CS#  (2 unrouted)
FPGA-CCLK  (2 unrouted)
FPGA-CLK  (1 unrouted)
FPGA-DONE  (1 unrouted)
FPGA-INIT#  (1 unrouted)
FPGA-MISO  (1 unrouted)
FPGA-MOSI  (2 unrouted)
FPGA-PROG_B  (2 unrouted)
FPGA-TCK  (2 unrouted)
FPGA-TDI  (1 unrouted)
FPGA-TDO  (1 unrouted)
FPGA-TMS  (1 unrouted)
GND  (via drill 0.25)  (49 unrouted)
  Top 0.127: U1.D4 8.2,30.17 v8.64,30.61 | U1.C4 8.2,31.19 v8.64,31.62 | U1.B7 v11.68,32.64 | U1.E9 13.27,29.15 v13.72,29.59 | U1.G8 12.29,27.15 v11.68,27.69 | U1.H7 11.2,26.19 v10.67,26.67 | U1.H9 v12.7,26.67 | U1.J8 v11.68,25.65 | U1.K7 v10.67,24.64 | U1.K9 13.22,24.15 v12.7,24.64 | U1.M8 12.24,22.15 v12.7,22.61 | U1.J5 9.2,25.2 | 9.2,25.2 v9.65,25.65 | U1.R6 v9.78,19.56 | U1.N13 v16.76,21.59 | 9.2,25.2 v8.64,24.64 | U1.R10 14.13,19.15 v13.72,19.56 | U1.B11 15.2,32.09 v14.73,31.62 | U1.L15 19.27,23.15 v19.68,22.73 | U1.T16 v20.2,17.53 v20.19,17.53 | U1.D13 17.2,30.17 16.76,30.61 v15.75,30.61 | U1.A16 v20.2,33.77 v20.19,33.78 | U1.G15 v19.68,26.67 | U1.A1 5.08,33.15 v4.7,32.77 | U1.G2 5.84,27.56 v4.57,27.56 | U1.L2 6.13,23.15 5.59,22.61 4.7,22.61 v4.57,22.73 | U1.P3 7.2,19.9 6.99,19.68 v4.45,19.68 | U1.T1 v5.2,17.53 v5.21,17.53 | U1.H12 16.2,26.11 v15.75,25.65
  Bottom 0.127: U3.41 18.81,21.09 19.68,21.97 v19.68,22.73 | U3.46 19.76,17.09 v20.19,17.53 | U3.54 18.82,10.69 v19.05,10.92 19.05,12.06 18.8,12.32 17.91,12.32 U3.52 | U3.28 18.67,31.49 18.8,31.62 18.8,32.51 v18.67,32.64 | U3.12 4.64,19.49 v4.45,19.68 | U3.6 7.58,14.69 v7.62,14.73
  pour Route2: 0.64,50.16 24.77,50.16 24.77,0.64 0.64,0.64
LDQM  (via drill 0.25)
  Top 0.127: U1.M4 8.18,22.15 v7.75,21.72
  Bottom 0.127: v7.75,21.72 7.62,21.72 7.49,21.84 6.57,21.84 U3.15
LED  (1 unrouted)
N$1  (3 unrouted)
N$2  (3 unrouted)
N$7  (1 unrouted)
N$8  (2 unrouted)
N$11  (1 unrouted)
OSC1  (2 unrouted)
OSC2  (2 unrouted)
PROG#  (1 unrouted)
RAS#  (via drill 0.25)
  Top 0.127: U1.L4 8.2,23.19 v8.64,22.61
  Bottom 0.127: v8.64,22.61 8.64,23.37 7.75,24.26 6.56,24.26 U3.18
RST#  (2 unrouted)
SD-CS#  (2 unrouted)
SDRAM-CLK  (via drill 0.25)
  Top 0.127: v16.76,23.62 16.24,24.15 U1.K12 16.2,24.19 15.62,24.77 15.49,24.77 15.37,24.64 15.37,24.31 U1.K11
  Bottom 0.127: v16.76,23.62 17.75,23.62 U3.38
SDRAM-CS#  (via drill 0.25)
  Top 0.127: U1.H4 8.2,26.09 v8.64,25.65
  Bottom 0.127: v8.64,25.65 8.51,25.65 8,25.15 6.57,25.15 U3.19
SENSE-USB  (2 unrouted)
TCK  (2 unrouted)
TDI  (2 unrouted)
TDO  (2 unrouted)
TMS  (2 unrouted)
UDQM  (via drill 0.25)
  Top 0.127: U1.L13 17.18,23.15 v16.76,22.73
  Bottom 0.127: v16.76,22.73 17.84,22.73 U3.39
USB_D+  (1 unrouted)
USB_D-  (1 unrouted)
VUSB  (1 unrouted)
WE#  (via drill 0.25)
  Top 0.127: U1.M3 7.2,22.19 v7.62,22.61
  Bottom 0.127: v7.62,22.61 6.61,22.61 U3.16

## Text on the board
tPlace: TDO | AIO1 | TMS | RS | TCK | TDI | AIO0 | 1.2 | 5.0 | GND | C31 | 3.3 | CH30 | CH14 | CH29 | CH13 | CH28 | CH12 | CH27 | CH11 | CH26 | CH10 | CH25 | CH9 | CH24 | CH8 | CH23 | CH7 | CH22 | CH6 | CH21 | CH5 | CH20 | CH4 | XESS | CH19 | CH3 | CH18 | c 2010 | CH2 | CH17 | CH1 | CH16 | CH0 | CH15 | CH-CLK
bPlace: +5V | +3.3V | +1.2V
tDocu: ANALOG-IO1 | RST# | ANALOG-IO0 | +1.2V | +5V | GND | p88 CHAN31 | +3.3V | p89 CHAN30 | CHAN14 p84 | p93 CHAN29 | CHAN13 p83 | p94 CHAN28 | CHAN12 p82 | p97 CHAN27 | CHAN11 p73 | p3 CHAN26 | CHAN10 p72 | p4 CHAN25 | CHAN9 p68 | p7 CHAN24 | CHAN8 p62 | p12 CHAN23 | CHAN7 p61 | p13 CHAN22 | CHAN6 p57 | p19 CHAN21 | CHAN5 p56 | p20 CHAN20 | CHAN4 p52 | p21 CHAN19 | CHAN3 p50 | p32 CHAN18 | CHAN2 p39 | p33 CHAN17 | CHAN1 p37 | p34 CHAN16 | CHAN0 p36 | p35 CHAN15 | CHAN-CLK p44 | 2010, XESS Corp. | All rights reserved. | Licensed under a Creative Commons | Attribution-Share-Alike Unported License. | See creativecommons.org/licenses/by-sa/3.0/